# EAGLE board SIHMTEST (EAGLE 8.0.0)
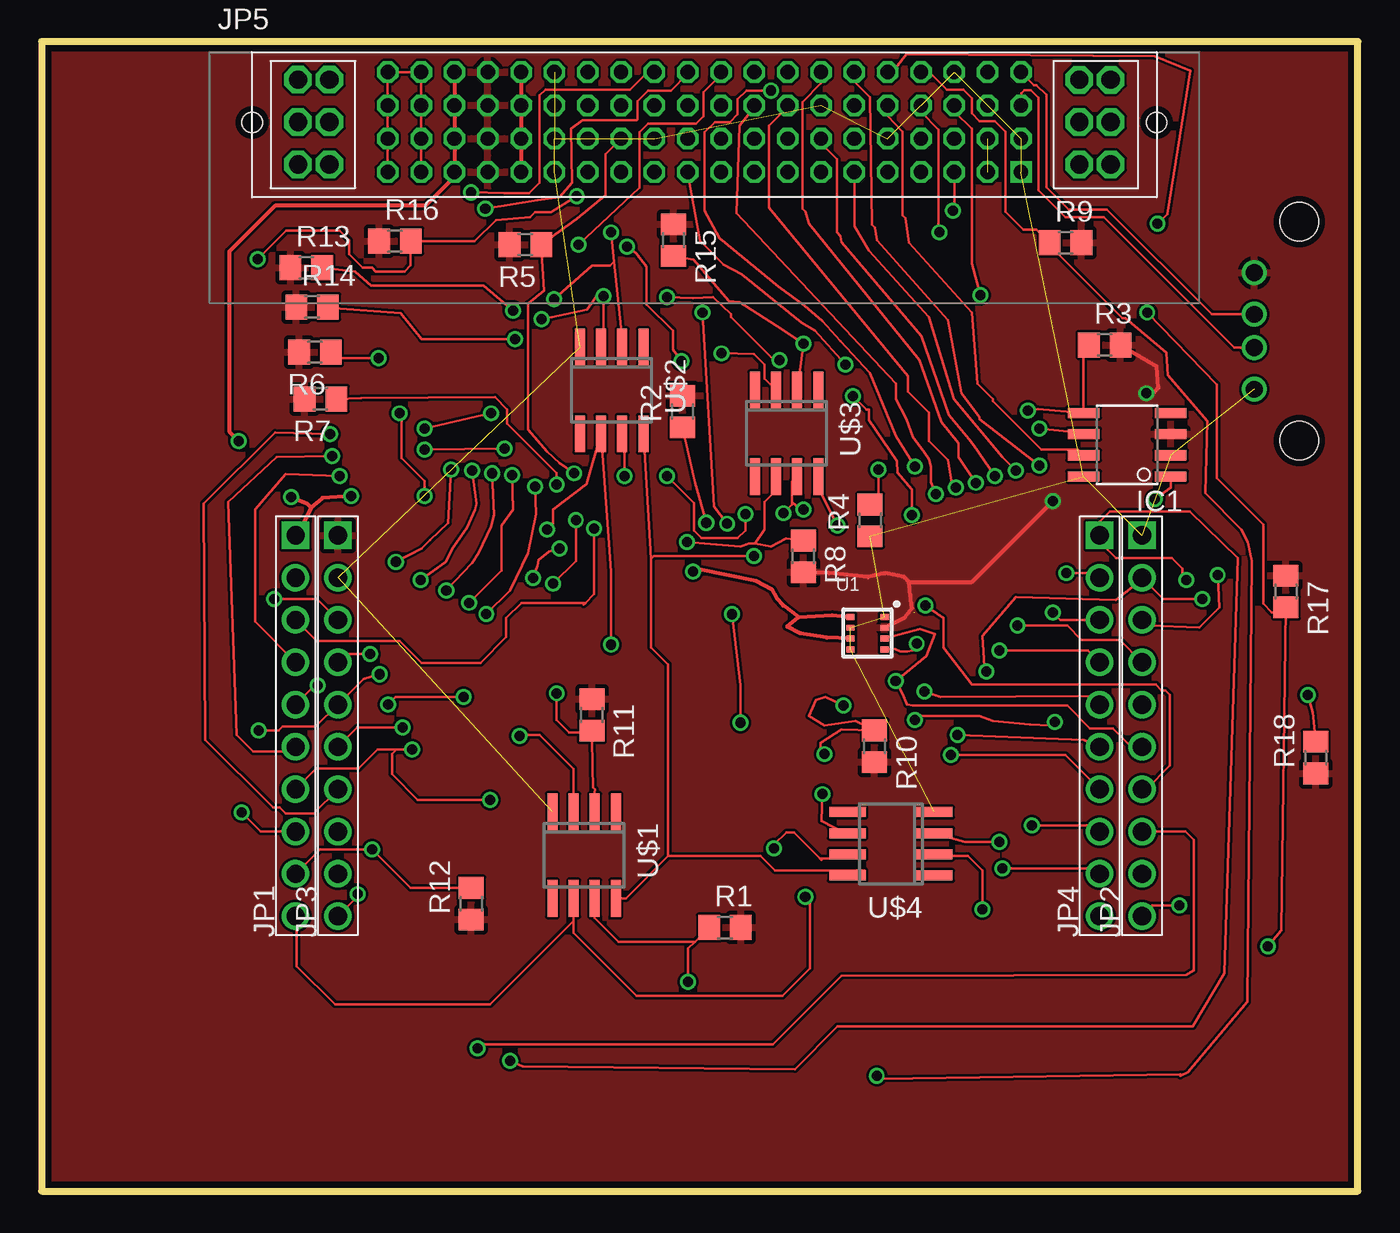
[diagram p0: board, top side]
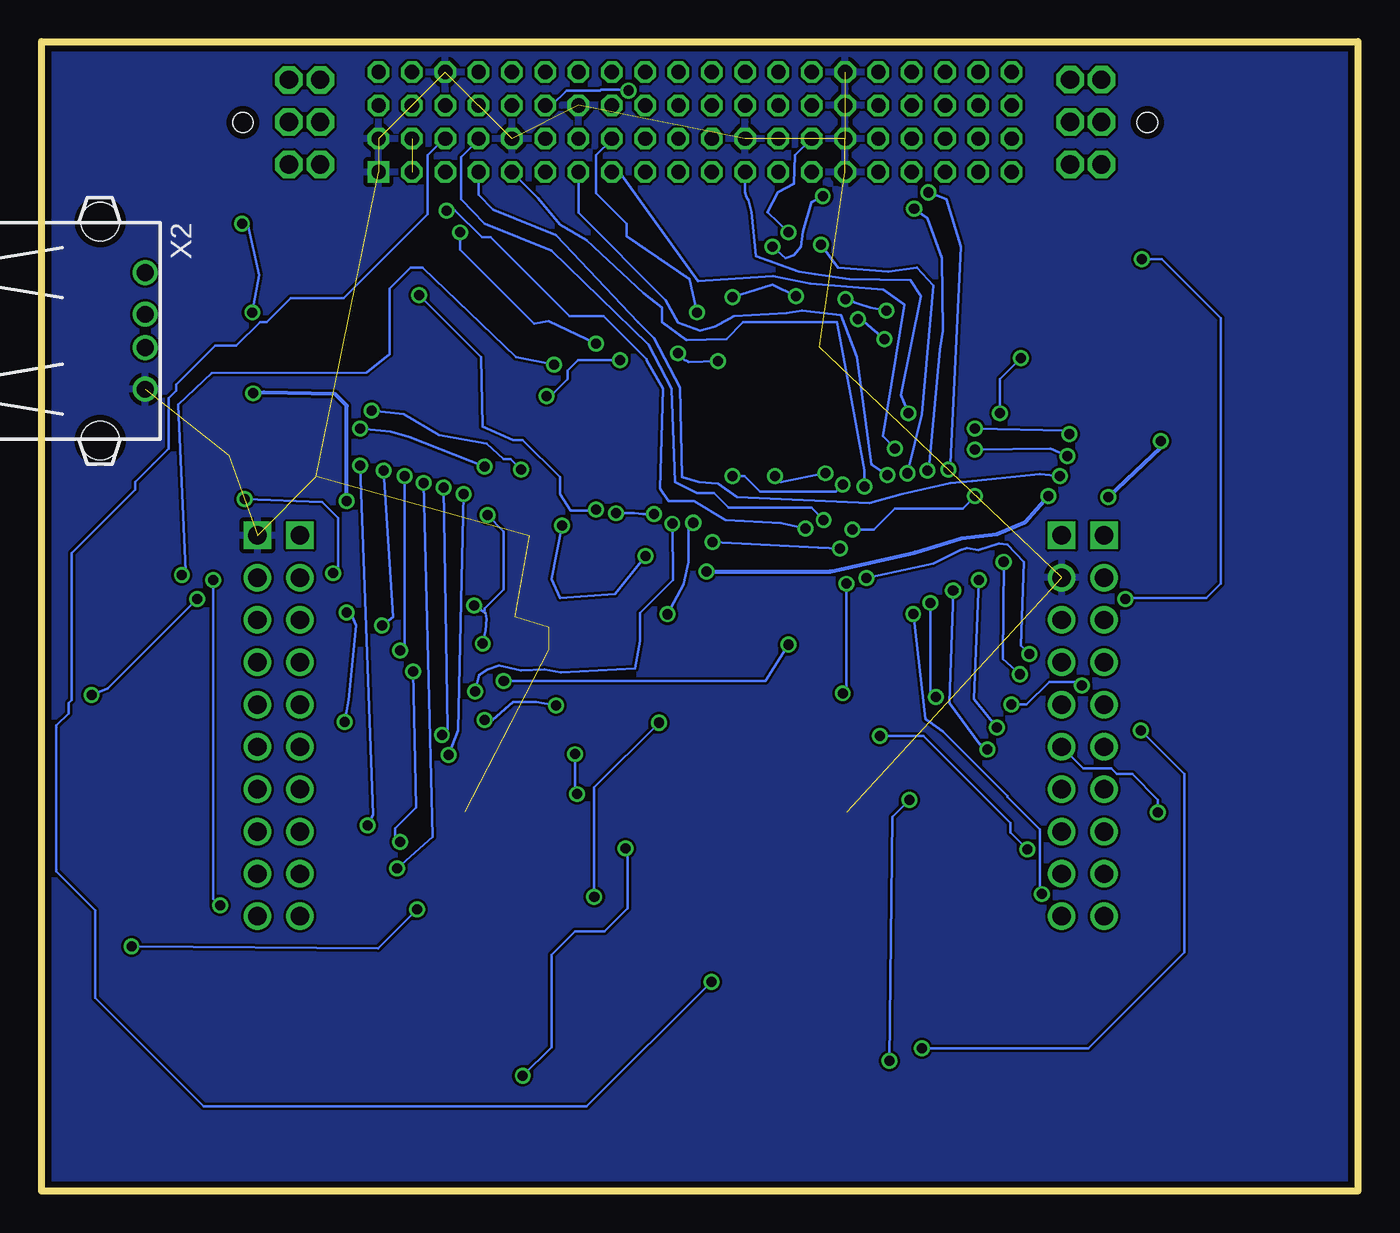
[diagram p1: board, bottom side, seen from below]

Size 79 x 69 mm. Coordinates in mm from the lower left corner, seen from the top.
Outline: 0,0 79,0 79,69 0,69 0,0
Copper layers (1*16): Top 0.0356mm / dielectric 1.5011mm / Bottom 0.0356mm
Design rules "OshPark": minimum track width 6mil, minimum drill 13mil, track to track 6mil, track to pad 6mil, pad to pad 6mil, via to via 6mil, smd to smd 6mil, copper to edge 15mil, drill to drill 6mil, minimum pad ring 7mil, minimum via ring 7mil, stop-mask expansion 3mil, vias tented up to drill 0mil, thermal gap 10mil
Net classes: 1 usb: clearance 0.152 mm

## Footprints (pad centres in the part's own frame; a part is rotated, then mirrored left to right if it is on the bottom)
SO08 = smd 0.61 x 1.905: 1 -1.905,-2.616; 2 -0.635,-2.616; 3 0.635,-2.616; 4 1.905,-2.616; 5 1.905,2.616; 6 0.635,2.616; 7 -0.635,2.616; 8 -1.905,2.616
KK254_10-PIN = drill 1.1 square: P$1 11.43,0 | drill 1.1: P$2 8.89,0; P$3 6.35,0; P$4 3.81,0; P$5 1.27,0; P$6 -1.27,0; P$7 -3.81,0; P$8 -6.35,0; P$9 -8.89,0; P$10 -11.43,0
MPSC-01-80 = drill 0.86 square: 1 19,0.33 | drill 0.86 octagon: 2 17,0.33; 3 15,0.33; 4 13,0.33; 5 11,0.33; 6 9,0.33; 7 7,0.33; 8 5,0.33; 9 3,0.33; 10 1,0.33; 11 -1,0.33; 12 -3,0.33; 13 -5,0.33; 14 -7,0.33; 15 -9,0.33; 16 -11,0.33; 17 -13,0.33; 18 -15,0.33; 19 -17,0.33; 20 -19,0.33; 21 19,2.33; 22 17,2.33; 23 15,2.33; 24 13,2.33; 25 11,2.33; 26 9,2.33; 27 7,2.33; 28 5,2.33; 29 3,2.33; 30 1,2.33; 31 -1,2.33; 32 -3,2.33; 33 -5,2.33; 34 -7,2.33; 35 -9,2.33; 36 -11,2.33; 37 -13,2.33; 38 -15,2.33; 39 -17,2.33; 40 -19,2.33; 41 19,4.33; 42 17,4.33; 43 15,4.33; 44 13,4.33; 45 11,4.33; 46 9,4.33; 47 7,4.33; 48 5,4.33; 49 3,4.33; 50 1,4.33; 51 -1,4.33; 52 -3,4.33; 53 -5,4.33; 54 -7,4.33; 55 -9,4.33; 56 -11,4.33; 57 -13,4.33; 58 -15,4.33; 59 -17,4.33; 60 -19,4.33; 61 19,6.33; 62 17,6.33; 63 15,6.33; 64 13,6.33; 65 11,6.33; 66 9,6.33; 67 7,6.33; 68 5,6.33; 69 3,6.33; 70 1,6.33; 71 -1,6.33; 72 -3,6.33; 73 -5,6.33; 74 -7,6.33; 75 -9,6.33; 76 -11,6.33; 77 -13,6.33; 78 -15,6.33; 79 -17,6.33; 80 -19,6.33 | drill 1.1 octagon: P1,1 -24.385,0.79; P1,2 -22.505,0.79; P1,3 -24.385,3.33; P1,4 -22.505,3.33; P1,5 -24.385,5.87; P1,6 -22.505,5.87; P2,1 24.385,0.789; P2,2 22.505,0.789; P2,3 24.385,3.329; P2,4 22.505,3.329; P2,5 24.385,5.869; P2,6 22.505,5.869 | hole 1.2: -27.145,3.3; 27.145,3.3
R0805 = smd 1.3 x 1.5: 1 -0.95,0; 2 0.95,0
BME280_LGA = smd 0.5 x 0.35: P$1 1.025,0.975; P$2 1.025,0.325; P$3 1.025,-0.325; P$4 1.025,-0.975; P$5 -1.025,-0.975; P$6 -1.025,-0.325; P$7 -1.025,0.325; P$8 -1.025,0.975
SO8 = smd 0.6 x 2.2: 1 -1.905,-2.6; 2 -0.635,-2.6; 3 0.635,-2.6; 4 1.905,-2.6; 5 1.905,2.6; 6 0.635,2.6; 7 -0.635,2.6; 8 -1.905,2.6
USB = drill 1: 1 -3.5,12.99; 2 -1,12.99; 3 1,12.99; 4 3.5,12.99 | hole 2.3: -6.57,10.28; 6.57,10.28

## Placement (x,y rotation side)
IC1  MCP2551/SN  [SO08]  65.15,44.81 90 top
JP1  KK254_10-PIN  [KK254_10-PIN]  15.24,27.94 90 top
JP2  KK254_10-PIN  [KK254_10-PIN]  66.04,27.94 90 top
JP3  KK254_10-PIN  [KK254_10-PIN]  17.78,27.94 90 top
JP4  KK254_10-PIN  [KK254_10-PIN]  63.5,27.94 90 top
JP5  [MPSC-01-80]  39.78,60.85 0 top
R1  5k  [R0805]  41.01,15.82 0 top
R2  5k  [R0805]  38.47,46.79 90 top
R3  10k  [R0805]  63.8,50.8 0 top
R4  10k  [R0805]  49.73,40.27 90 top
R5  5k  [R0805]  29.04,56.81 180 top
R6  5k  [R0805]  16.4,50.36 180 top
R7  5k  [R0805]  16.74,47.56 180 top
R8  5k  [R0805]  45.71,38.11 270 top
R9  5k  [R0805]  61.46,56.92 0 top
R10  5k  [R0805]  49.99,26.71 270 top
R11  5k  [R0805]  33.02,28.59 270 top
R12  5k  [R0805]  25.79,17.25 90 top
R13  5k  [R0805]  15.89,55.42 0 top
R14  5k  [R0805]  16.24,53.08 0 top
R15  5k  [R0805]  37.93,57.08 270 top
R16  5k  [R0805]  21.21,57.03 0 top
R17  5k  [R0805]  74.69,35.99 270 top
R18  5k  [R0805]  76.47,26.02 90 top
U1  BME280  [BME280_LGA]  49.57,33.5 0 top
U$1  P82B715  [SO8]  32.56,20.17 180 top
U$2  P82B715  [SO8]  34.21,48.06 180 top
U$3  P82B715  [SO8]  44.71,45.49 180 top
U$4  P82B715  [SO8]  50.97,20.85 90 top
X2  [USB]  85.78,51.63 270 bottom

## Library data of the parts
IC1 = microchip-dspic
JP1-JP4 = molex
JP5 = samtec
R1-R18 = resistor
U1 = BME280ComponentLibrary; PROD_ID: IC-13090
U$1-U$4 = NXP
X2 = con-amp

## Nets
3.3V: JP1.P$1 JP5.18 JP5.38 JP5.58 JP5.78 U1.P$6 U1.P$8
5V: IC1.3 JP3.P$1 JP5.17 JP5.37 JP5.57 JP5.77 R1.2 R2.2 R3.2 R5.2 R6.2 R7.2 R8.2 R9.2 R10.2 R11.1 R12.1 R13.1 R14.1 R15.1 R16.1 R17.1 R18.1 U1.P$2 X2.1
12V: JP5.16 JP5.36 JP5.56 JP5.76
ACT_SCL: JP5.24 R11.2 U$1.2
ACT_SDA: JP5.23 R1.1 U$1.7
ACT_UNBUFFERSCL: JP1.P$9 R12.2 U$1.3
ACT_UNBUFFERSDA: JP1.P$10 R2.1 U$1.6
AGND: JP5.19 JP5.20 JP5.39 JP5.40 JP5.59 JP5.60 JP5.79 JP5.80
BATT_SCL: JP5.44 R15.2 U$3.2
BATT_SDA: JP5.43 R7.1 U$3.7
BATT_UNBUFFERSCL: JP3.P$3 R16.2 U$3.3
BATT_UNBUFFERSDA: JP3.P$4 R8.1 U$3.6
BUFFERVCC: U$1.8 U$2.8 U$3.8 U$4.8
CANH: IC1.7 JP5.45
CANL: IC1.6 JP5.46
CANRX: IC1.4
CANTX: IC1.1 JP4.P$2
CE_2: JP5.52
CE_3: JP5.53
CE_4: JP5.54
CE_CPU: JP5.74
CE_LEDS: JP5.73
CTS_CF: JP5.13
CTS_MC: JP5.29
CTS_MD: JP5.68
CTS_MF: JP3.P$10 JP5.5
CTS_PF: JP5.9
CTS_SF: JP5.50
DGND: IC1.2 IC1.8 JP2.P$1 JP3.P$2 JP5.1 JP5.15 JP5.21 JP5.25 JP5.32 JP5.35 JP5.47 JP5.55 JP5.63 JP5.75 R4.1 U1.P$1 U1.P$5 U1.P$7 U$1.4 U$2.4 U$4.4 X2.4
EXT_SCL: JP5.34 R13.2 U$2.2
EXT_SDA: JP5.33 R5.1 U$2.7
EXT_UNBUFFERSCL: JP2.P$7 R14.2 U1.P$4 U$2.3
EXT_UNBUFFERSDA: JP2.P$6 R6.1 U1.P$3 U$2.6
GPIO: JP5.2 JP5.22
GPIO_42: JP5.42
GPIO_62: JP5.62
INT_SCL: JP5.65 R17.2 U$4.2
INT_SDA: JP5.64 R9.1 U$4.7
INT_UNBUFFERSCL: JP2.P$2 R18.2 U$4.3
INT_UNBUFFERSDA: JP4.P$3 R10.1 U$4.6
MISO: JP2.P$8 JP3.P$5 JP5.72
MOSI: JP1.P$8 JP3.P$6 JP5.71
N$2: IC1.5 R3.1 R4.2
PA3: JP2.P$9
PB5: JP1.P$2
PE2: JP3.P$8
PE3: JP3.P$9
PF4: JP4.P$10
PWM_0: JP5.31
PWM_1: JP5.26
RES: JP2.P$5
RTS_CF: JP5.14
RTS_MC: JP5.30
RTS_MD: JP5.69
RTS_MF: JP2.P$4 JP5.6
RTS_PF: JP5.10
RTS_SF: JP5.51
RX_CF: JP2.P$3 JP5.11
RX_MC: JP4.P$4 JP5.27
RX_MD: JP4.P$8 JP5.66
RX_MF: JP1.P$3 JP5.3
RX_PF: JP1.P$5 JP5.7
RX_SF: JP4.P$6 JP5.48
SPI_CLK: JP1.P$7 JP2.P$10 JP4.P$1 JP5.70
TX_CF: JP3.P$7 JP5.12
TX_MC: JP4.P$5 JP5.28
TX_MD: JP4.P$9 JP5.67
TX_MF: JP1.P$4 JP5.4
TX_PF: JP1.P$6 JP5.8
TX_SF: JP4.P$7 JP5.49
USB_N [usb]: JP5.61 X2.2
USB_P [usb]: JP5.41 X2.3

## Tracks (layer width: path | path; a pad name or v marks a point on that pad's centre or on a via)
3.3V  (via drill 0.6, 0.61)
  Top 0.254: U1.P$6 47.12,33.23 45.55,33.49 44.75,33.89 45.43,34.46 | 45.43,34.46 47.46,34.58 U1.P$8 | v39.09,37.2 39.49,37.32 42.86,36.63 43.83,36.12 44.14,35.57 44.52,35.15 45.43,34.46 | v18.57,41.72 16.86,41.6 16.17,41.03 | 16.17,41.03 15.49,39.62 JP1.P$1 | JP5.78 JP5.58 JP5.38 JP5.18 24.78,60.9 23.03,59.15 14,59.15 11.26,56.41 11.26,45.61 v11.83,45.03 | v14.97,41.66 15.95,41.26 16.17,41.03
  Bottom 0.254: v39.09,37.2 31.66,37.2 26.57,38.35 23.77,39.2 21.66,39.43 19.95,40.18 v18.57,41.72 | v11.83,45.03 11.83,44.63 v14.97,41.66
5V  (via drill 0.6)
  Top 0.254: U1.P$2 51.82,34.45 52.23,34.98 52.06,36.58 | 52.06,36.58 51.78,36.86 50.63,37.09 49.61,36.86 47.28,37.09 R8.2 | 52.06,36.58 55.84,36.58 v60.69,41.43 | v66.29,47.89 66.81,48.01 67.04,48.23 66.92,49.49 R3.2
  Bottom 0.254: v60.69,41.43 60.69,47.15 61.38,47.84 65.67,47.95 v66.29,47.89
  pour Top: 0,68.94 79,69 79,0 0,0
12V
  Top 0.254: JP5.76 JP5.56 JP5.36 JP5.16
ACT_SCL  (via drill 0.6)
  Top 0.152: U$1.2 33.03,22.94 33.2,24.12 33.09,24.23 33.09,24.63 33.08,25.04 R11.2 32.93,27.55 31.66,27.55 30.92,28.29 v30.92,29.89 | v32.06,40.29 32.06,37.83 v30.69,36.46
  Bottom 0.152: JP5.24 52.78,63.12 53.84,62.06 53.84,59.55 52.41,58.06 48.41,56.46 42.58,50.81 41.2,48.18 40.98,42.58 39.66,41.89 38.63,41.89 37.78,41.03 32.8,41.03 v32.06,40.29 | v30.69,36.46 30.69,30.12 v30.92,29.89
ACT_SDA  (via drill 0.6)
  Top 0.152: U$1.7 33.2,16.41 34.63,14.97 39.21,14.97 | 39.21,14.97 R1.1 | v38.8,12.57 38.8,14.56 39.21,14.97
  Bottom 0.152: JP5.23 54.84,63.18 55.84,62.18 55.84,58.64 60.87,53.61 64.06,53.61 65.49,52.18 65.89,52.18 67.32,50.75 68.58,50.75 70.92,48.41 70.92,48.06 71.38,47.61 71.38,44.58 73.38,42.58 73.38,42.12 77.21,38.29 77.21,29.49 77.38,29.32 77.38,28.69 78.12,27.95 78.12,19.2 75.78,16.86 75.78,11.6 69.27,5.09 46.29,5.09 v38.8,12.57
ACT_UNBUFFERSCL  (via drill 0.61)
  Top 0.152: U$1.3 31.93,25.34 29.89,27.38 28.75,27.38 v28.69,27.32 | JP1.P$9 16.71,20.52 v19.83,20.52 22.14,18.2 R12.2
  Bottom 0.152: v28.69,27.32 26.06,27.32 20.86,22.12 20.86,21.55 v19.83,20.52
ACT_UNBUFFERSDA  (via drill 0.61)
  Top 0.152: v45.83,17.66 46.12,17.37 46.12,13.37 44.46,11.72 35.72,11.72 31.93,15.51 U$1.6 31.93,16.21 26.92,11.2 17.6,11.2 15.32,13.49 15.32,16.43 JP1.P$10 | v41.95,28.12 41.95,30.35 v41.43,34.63 | v39.89,40.12 39.2,42.53 R2.1
  Bottom 0.152: v45.83,17.66 45.83,24.23 v41.95,28.12 | v41.43,34.63 40.46,36.41 40.18,37.78 40.18,39.83 v39.89,40.12
AGND
  Top 0.152: JP5.19 JP5.39 JP5.59 JP5.79 JP5.80 JP5.60 JP5.40 JP5.20
BATT_SCL  (via drill 0.6)
  Top 0.152: JP5.44 52.78,64.78 53.84,63.72 53.84,57.61 v53.89,57.55 | U$3.2 45.38,48.12 v45.72,50.86 44.86,51.44 44.46,51.72 41.89,53.38 41.26,53.44 39.14,55.9 R15.2
  Bottom 0.152: v53.89,57.55 53.89,56.52 49.44,52.06 48.58,52.23 v45.72,50.86
BATT_SDA  (via drill 0.6)
  Top 0.152: JP5.43 54.78,64.78 55.84,63.78 55.84,55.66 v56.35,53.78 | v45.72,40.92 45.26,41.15 45.03,41.38 | 45.03,41.38 45.03,42.58 U$3.7 | 45.03,41.38 45.03,41.2 v44.52,40.69 | v42.23,40.63 42.23,39.66 41.78,39.2 39.6,39.2 39.15,39.66 39.15,41.32 v37.55,42.92 | v30.92,42.41 30.92,43.09 27.95,46.06 27.95,46.92 27.2,47.66 19.17,47.61 R7.1
  Bottom 0.152: v56.35,53.78 52.63,50.06 52.52,45.89 50.69,45.09 50.12,45.09 47.89,42.86 47.89,41.83 47.26,40.86 46.01,40.86 v45.72,40.92 | v44.52,40.69 43.43,40.69 42.92,40.63 v42.23,40.63 | v37.55,42.92 36.8,42.92 35.89,42.01 31.32,42.01 v30.92,42.41
BATT_UNBUFFERSCL  (via drill 0.6)
  Top 0.152: v32.12,59.72 30.57,58.75 29.6,58.75 29.32,58.46 27.26,58.29 26,57.03 R16.2 22.16,55.59 21.77,55.21 20.06,55.21 19.83,55.44 19.26,55.44 18.46,56.24 18.46,57.09 17.89,57.66 14.69,57.66 v12.97,55.95 | v35.15,56.69 35.66,56.29 36.29,55.49 36.29,53.21 37.89,51.66 37.89,50.52 v38.41,49.84 | v40.8,50.29 42.75,50.23 43.38,49.61 43.38,48.79 U$3.3 | v13.95,35.55 16.52,35.55 JP3.P$3
  Bottom 0.152: v32.12,59.72 32.8,59.38 33.32,57.61 33.43,56.69 33.83,56.18 34.35,56.01 v35.15,56.69 | v38.41,49.84 40.18,49.78 40.23,49.84 40.41,49.89 v40.8,50.29 | v12.97,55.95 11.77,55.95 8.23,52.41 8.23,36.46 9.09,35.6 13.89,35.6 v13.95,35.55
BATT_UNBUFFERSDA  (via drill 0.6)
  Top 0.152: R8.1 44.67,39.17 43.78,38.69 42.82,38.87 | U$3.6 44.06,42.88 44.06,42.06 43.38,41.38 43.38,39.71 42.82,38.87 | 42.82,38.87 42.46,38.86 41.95,38.69 40.52,38.8 v38.75,38.98 | v31.09,38.58 30.46,38.41 29.83,37.89 29.77,37.55 v29.49,36.8 | v19.72,32.23 18.26,32.23 JP3.P$4
  Bottom 0.152: v38.75,38.98 32.4,38.63 v31.09,38.58 | v29.49,36.8 25.49,37.66 23.86,38.49 23.46,38.6 22.77,38.49 21.55,38.86 21.03,38.8 20.06,37.78 20.23,32.75 v19.72,32.23
BUFFERVCC  (via drill 0.6)
  Top 0.152: U$1.8 35.06,17.57 37.6,20.12 | 37.6,20.12 37.6,31.6 36.58,32.63 36.58,37.34 36.58,37.95 | 36.58,37.95 U$2.8 | 37.6,20.12 43.15,20.12 44.01,19.26 49.38,19.26 U$4.8 | U$3.8 46.62,42.2 v47.78,39.95 | v42.75,38.12 36.75,38.12 36.58,37.95
  Bottom 0.152: v47.78,39.95 48.41,36.75 47.89,35.6 44.58,35.83 v42.75,38.12
CANH
  Top 0.152: JP5.45 50.78,64.55 51.66,63.61 51.66,58.58 51.84,58.41 52.06,56.92 55.84,52.75 56.18,48.46 57.09,47.55 57.09,47.43 60.01,44.52 62.19,44.52 IC1.7
CANL  (via drill 0.6, 0.61)
  Top 0.152: v43.78,66.06 42.29,66.06 41.78,65.55 41.78,64.64 41.32,64.18 40.41,64.18 39.78,63.55 39.78,58.86 | 39.78,58.86 39.83,58.81 | 39.78,58.86 40.69,57.21 44.23,54.29 45.78,53.15 46.86,52.23 47.95,51.03 49.72,49.09 51.26,45.32 v52.41,43.49 | v59.89,45.78 62.48,45.49 IC1.6
  Bottom 0.152: JP5.46 48.38,65.18 47.49,66.06 45.49,66.06 45.43,66.12 43.83,66.12 v43.78,66.06 | v52.41,43.49 56.92,45.26 58.06,45.61 v59.89,45.78
CANTX  (via drill 0.6)
  Top 0.152: IC1.1 67.77,42.22 v66.81,41.55 | v61.49,37.09 63.24,37.09 JP4.P$2
  Bottom 0.152: v66.81,41.55 62.18,41.38 61.21,40.41 61.21,37.38 v61.49,37.09
CTS_MF  (via drill 0.6)
  Top 0.152: v29.6,42.29 29.66,40.63 29.2,38.29 28.12,36.06 v26.69,34.63 | v18.97,17.83 18.97,17.7 JP3.P$10
  Bottom 0.152: JP5.5 49.21,59.61 47.89,58.01 46.29,57.09 42.86,53.89 41.78,53.03 41.78,52.18 40.29,51.09 37.89,51.15 36.92,52.18 31.26,52.18 30.52,48.18 29.6,43.26 v29.6,42.29 | v26.69,34.63 25.95,28.35 24.92,27.6 21.03,23.72 21.03,23.66 19.09,21.72 19.09,17.95 v18.97,17.83
DGND  (21 unrouted)
  pour Bottom: 0,69 79,69 79,0 0,0
EXT_SCL  (via drill 0.6)
  Top 0.152: 34.36,55.79 v34.18,57.55 | 34.36,55.79 34.86,50.99 U$2.2 | R13.2 18.82,55.19 19.77,54.35 26.52,54.35 v28.29,52.86 | v30.75,53.55 33.03,55.55 34.12,55.55 34.36,55.79
  Bottom 0.152: JP5.34 33.78,62.18 33.83,60.47 34.8,59.95 35.43,58.75 v34.18,57.55 | v28.29,52.86 29.26,53.03 30,53.26 v30.75,53.55
EXT_SDA  (via drill 0.6)
  Top 0.152: v34.98,42.92 34.98,45.33 U$2.7 | JP5.33 33.83,62.23 33.83,59.78 32.13,58.37 R5.1 30.16,54.05 29.2,53.26 29.2,45.72 30.35,44.41 31.09,43.72 v31.95,43.09
  Bottom 0.152: v31.95,43.09 34.63,42.58 v34.98,42.92
EXT_UNBUFFERSCL  (via drill 0.6)  (1 unrouted)
  Top 0.152: JP2.P$7 66.31,24.13 67.72,25.55 67.72,29.77 67.44,30.06 67.21,30.06 66.86,30.4 55.84,30.4 54.12,32.63 54.12,34.4 v53.03,35.15 | v52.52,32.86 52.29,32.52 52.29,32.46 51.95,32.4 51.55,32.4 51.21,32.54 U1.P$4 | v52.23,40.58 52.23,42.12 51.38,43.15 51.32,43.83 49.66,46.29 49.66,46.92 49.49,46.92 v48.69,47.72 | v44.29,49.89 43.95,49.89 41.38,52.46 41.38,52.63 40.29,53.66 39.09,53.61 v37.55,53.66 | U$2.3 33.72,50.81 v33.72,53.72 33.32,53.72 32.75,52.92 30.63,52.46 v30,52.35 | v28.4,51.15 22.8,51.15 21.55,52.69 17.12,53.03 R14.2
  Bottom 0.152: v53.03,35.15 52.35,34.69 52.29,34.35 52.35,33.66 v52.52,32.86 | 52.4,34.73 52.4,34.98 51.26,36.12 51.26,39.6 v52.23,40.58 | v48.69,47.72 48.46,47.72 47.43,48.75 47.43,49.26 46.81,49.89 v44.29,49.89 | v37.55,53.66 35.15,54.41 v33.72,53.72 | v30,52.35 29.6,52.18 v28.4,51.15
EXT_UNBUFFERSDA  (via drill 0.6, 0.61)
  Top 0.152: U1.P$3 52.73,33.74 53.61,33.43 53.09,32.12 v51.26,30.63 51.66,29.89 51.95,29.2 52.29,29.15 61.55,29.15 62.92,27.77 64.29,27.77 65.4,26.67 JP2.P$6 | v34.18,32.8 34.18,37.2 U$2.6 32.72,42.43 30.69,40.92 30.69,40.06 v30.35,39.72 | v22.97,41.72 22.97,42.63 21.6,44.01 21.6,46.58 v21.49,46.69 | v20.23,50.01 17.3,50.01 R6.1
  Bottom 0.152: v51.26,30.63 35.55,30.63 v34.18,32.8 | v30.35,39.72 29.03,39.72 27.77,40.98 23.72,40.98 v22.97,41.72 | v21.49,46.69 21.49,48.75 v20.23,50.01
GPIO  (1 unrouted)
INT_SCL  (via drill 0.6)
  Top 0.152: JP5.65 51.06,67.18 51.89,68.24 66.81,68.12 68.93,67.27 67.56,58.64 v66.98,58.06 | v66.35,52.75 70.53,48.41 70.53,42.8 73.32,40.01 73.32,35.26 73.84,34.75 74.39,34.75 R17.2 74.4,15.65 v73.61,14.69 | v56.46,16.92 56.46,19.26 55.61,20.12 53.67,20.12 U$4.2
  Bottom 0.152: v66.98,58.06 66.64,58.06 65.95,54.98 v66.35,52.75 | v73.61,14.69 58.81,14.57 v56.46,16.92
INT_SDA  (via drill 0.6)
  Top 0.152: JP5.64 53.3,67.18 54.35,66.12 55.32,66.12 55.84,65.61 55.84,64.69 56.29,64.24 57.21,64.24 57.84,63.61 57.84,58.81 58.92,57.72 59.7,57.72 R9.1 60.51,56.77 64.86,52.41 65.04,52.41 67.49,50.35 67.61,48.98 69.95,46.23 69.84,41.89 72.01,39.72 72.41,38.98 72.64,37.83 72.35,11.37 68.81,7.14 68.35,6.92 68.35,7.03 50.29,6.74 v50.12,6.92 | v43.95,20.57 43.95,20.8 44.69,21.55 45.15,21.55 46.72,19.97 | 46.72,19.97 46.81,19.89 | 46.72,19.97 48.13,19.97 U$4.7
  Bottom 0.152: v50.12,6.92 48.41,8.63 48.41,14.17 46.98,15.6 45.21,15.6 43.83,16.97 43.83,20.46 v43.95,20.57
INT_UNBUFFERSCL  (via drill 0.6)
  Top 0.152: v56.69,31.2 56.58,31.49 56.46,33.32 58.46,35.66 64.47,35.49 66.04,36.72 JP2.P$2 67.32,35.55 v69.67,35.55 | v57.49,20.97 55.4,20.97 U$4.3 | R18.2 76.3,28.74 v76.01,29.77
  Bottom 0.152: v56.69,31.2 56.52,23.03 57.78,21.77 57.78,21.26 v57.49,20.97 | v76.01,29.77 75.04,30.18 v69.67,35.55
INT_UNBUFFERSDA  (via drill 0.6)
  Top 0.152: JP4.P$3 61.15,34.29 v60.69,34.75 | v60.81,28.18 60.52,27.95 59.32,28 57.09,28.23 56.29,28.52 52.63,28.52 v52.41,28.29 | v48.12,29.15 47.03,29.66 46.46,29.49 46.06,28.52 46.98,27.95 48.85,28.23 R10.1 48,27.71 46.75,26.92 46.75,26.46 v46.98,26.23 | v46.86,23.83 46.81,22.23 48.31,21.43 U$4.6
  Bottom 0.152: v60.69,34.75 60.47,34.75 60.12,33.95 60.58,29.49 v60.81,28.18 | v52.41,28.29 51.95,28.29 50.69,29.38 49.32,29.38 v48.12,29.15 | v46.98,26.23 46.98,23.95 v46.86,23.83
MISO  (via drill 0.6, 0.61)
  Top 0.152: JP5.72 36.37,67.18 35.32,66.12 30.23,66.12 29.89,65.78 29.89,60.52 29.26,59.89 27.77,59.89 v25.77,59.95 | v24.57,43.32 24.4,40.12 23.32,39.09 22.8,38.58 v21.26,37.78 | v20.29,31.03 19.32,30.75 JP3.P$5 16.46,27.89 14.46,27.89 14.23,27.66 v13.03,27.66 | JP2.P$8 68.65,21.59 69.15,21.09 69.15,13.26 68.69,12.97 48.01,12.92 43.89,8.8 26.4,8.8 v26.18,8.57
  Bottom 0.152: v25.77,59.95 24.69,59.55 23.83,56.69 24.46,43.66 v24.57,43.32 | v21.26,37.78 21.32,31.95 v20.29,31.03 | v26.18,8.57 16.17,8.57 10.4,14.35 10.4,25.03 v13.03,27.66
MOSI  (via drill 0.6, 0.61)
  Top 0.152: JP5.71 38.78,67.07 37.78,66.06 36.41,66.06 35.78,65.44 35.78,64.35 35.72,64.29 32.46,64.29 31.77,63.78 31.83,60.52 31.09,59.66 29.77,59.49 v26.63,58.98 | v25.83,43.26 26.12,41.26 26,40.92 25.55,39.83 24.69,38.63 24.23,37.78 v22.75,36.69 | v21.66,27.83 18.94,27.83 JP3.P$6 | JP1.P$8 13.16,21.59 v12,22.75
  Bottom 0.152: v26.63,58.98 25.83,58.41 24.98,56.01 24.92,51.66 25.09,50.52 25.72,43.72 v25.83,43.26 | v22.75,36.69 23.03,29.55 v21.66,27.83 21.6,27.77 | v12,22.75 12,23.49 13.54,25.03 14.46,25.03 14.8,25.38 16.48,25.38 JP3.P$6
N$2  (via drill 0.6)
  Top 0.152: R3.1 62.53,49.97 IC1.5 59.8,46.94 v59.21,46.86 | v50.23,43.32 50.23,41.72 R4.2
  Bottom 0.152: v59.21,46.86 57.26,46.63 55.15,45.38 52.29,44.86 51.26,43.95 50.86,43.95 v50.23,43.32
RTS_MF  (via drill 0.6)
  Top 0.152: JP5.6 48.78,57.92 49.66,56.46 53.26,52.46 54.75,47.55 57.66,44.06 v58.46,43.26 | v58.58,33.95 61.55,33.95 62.41,33.09 64.7,33.09 JP2.P$4
  Bottom 0.152: v58.46,43.26 57.89,34.46 v58.58,33.95
RX_CF  (via drill 0.6)
  Top 0.152: JP5.11 39.52,57.06 40.92,55.61 42.01,55.03 45.61,52.12 46.41,51.66 v48.23,49.61 | v70.58,36.98 70.69,35.03 69.49,33.83 66.38,33.95 JP2.P$3
  Bottom 0.152: v48.23,49.61 50.52,50.06 56.12,55.44 56.86,55.44 58.12,54.18 58.12,50.23 59.49,49.15 68.81,49.09 70.81,47.21 70.35,37.2 v70.58,36.98
RX_MC  (via drill 0.6)
  Top 0.152: JP5.27 46.78,62.89 47.72,61.95 47.72,57.55 47.95,57.32 48.01,56.98 52.81,51.32 54.46,46.58 55.66,45.15 55.95,44.75 v57.21,42.92 | v57.49,32.46 62.79,32.46 JP4.P$4
  Bottom 0.152: v57.21,42.92 57.21,32.75 v57.49,32.46
RX_MD  (via drill 0.6)
  Top 0.152: JP5.66 48.78,66.61 49.72,65.67 49.84,58.01 50.01,57.84 50.12,57.09 54.41,52.29 55.21,47.89 56.29,46.46 56.29,46.35 v59.89,43.55 | v59.44,21.95 63.14,21.95 JP4.P$8
  Bottom 0.152: v59.89,43.55 59.09,22.57 v59.44,21.95
RX_MF  (via drill 0.6)
  Top 0.152: JP5.3 54.78,58.95 v54.69,58.86 | v33.15,39.78 33.15,35.83 32.63,35.32 | 32.63,35.32 32.52,35.2 | 32.63,35.32 28.8,35.32 27.89,34.4 27.89,33.26 26.35,31.72 22.8,31.72 21.49,33.03 16.5,33.03 JP1.P$3
  Bottom 0.152: v54.69,58.86 54.18,58.86 52.58,57.26 52.06,57.26 47.32,52.52 45.26,52.52 42.69,49.95 42.69,49.89 41.72,48.18 41.89,42.18 41.38,41.43 39.83,41.43 37.95,40.29 34.63,40.12 v33.15,39.78
RX_PF  (via drill 0.6)
  Top 0.152: v28.23,42.98 28.29,40.92 27.6,39.95 27.6,37.26 v25.66,35.32 | v25.32,29.66 21.26,29.66 v20.8,29.2 | v16.57,30.35 16.38,30.35 JP1.P$5
  Bottom 0.152: JP5.7 46.78,58.72 41.55,53.49 40.8,52.12 39.49,51.66 38.58,51.89 37.43,52.52 34.29,52.69 33.38,52.86 31.03,52.58 30.06,50.06 29.2,43.6 v28.23,42.98 | v25.66,35.32 25.66,30 v25.32,29.66 | v20.8,29.2 19.89,29.2 18.52,30.57 16.8,30.57 v16.57,30.35
RX_SF  (via drill 0.6)
  Top 0.152: JP5.48 44.78,65.06 43.66,63.95 43.66,59.04 52.01,48.92 52.01,48.01 53.26,46.75 53.26,45.03 54.41,43.89 54.63,42.46 v54.86,42.23 | v54.98,27.38 62.57,27.09 JP4.P$6
  Bottom 0.152: v54.86,42.23 54.63,27.72 v54.98,27.38
SPI_CLK  (via drill 0.6, 0.61)
  Top 0.152: JP5.70 40.78,67.01 39.72,65.95 39.72,64.52 39.26,64.06 36.41,64.06 35.89,63.55 35.89,60.24 v32.23,56.81 | v27.03,43.09 27.15,40.58 26.98,39.89 26.23,38.29 25.83,37.72 v24.29,36.06 | 21.32,26.52 v22.23,26.52 | 21.32,26.52 20.17,26.52 19.03,25.38 16.48,25.38 JP1.P$7 | v68.69,36.69 68.47,36.92 68.47,37.38 67.84,38.01 64.47,38.01 63.5,38.97 JP4.P$1 63.5,40.18 64.12,40.8 68.92,40.8 71.78,38.01 70.98,13.09 69.09,9.89 47.78,9.89 45.21,7.32 28.86,7.49 v28.12,7.83 | v68.29,17.14 66.67,17.14 JP2.P$10 | v26.92,23.49 22.57,23.49 21.03,25.03 21.03,26.23 21.32,26.52
  Bottom 0.152: v32.23,56.81 31.2,55.44 28.18,55.21 26.46,55.44 25.49,54.35 26.18,46.63 v27.03,43.09 | v24.29,36.06 24.52,29.32 22.69,26.8 22.52,26.8 v22.23,26.52 | v68.69,36.69 68.69,17.55 v68.29,17.14 | v28.12,7.83 27.95,22.46 v26.92,23.49
TX_CF  (via drill 0.6)
  Top 0.152: v26.98,46.69 v22.97,45.78 | v17.32,45.43 14,45.55 9.72,41.26 9.83,27.09 13.89,23.03 14.29,23.03 14.63,22.69 16.34,22.69 JP3.P$7
  Bottom 0.152: JP5.12 36.78,59.98 36.69,59.66 36.58,59.49 36.41,58.75 36.12,56.12 33.55,55.21 32.58,55.03 30.52,54.75 26.86,54.69 26.23,53.72 27.43,47.78 v26.98,46.69 | v22.97,45.78 17.55,45.66 v17.32,45.43
TX_MC  (via drill 0.6)
  Top 0.152: v39.66,52.75 40.35,41.09 v41.15,40.06 | v52.98,30 53.95,29.66 62.99,29.72 JP4.P$5
  Bottom 0.152: JP5.28 44.78,63.12 45.72,62.18 45.72,59.89 43.89,58.06 43.89,57.32 40.12,54.75 v39.66,52.75 | v41.15,40.06 41.09,36.69 43.09,34.69 43.09,33.03 43.38,31.38 47.84,31.15 48.81,31.32 50.23,31.26 51.55,31.55 52.23,31.32 52.75,30.98 v52.98,30
TX_MD  (via drill 0.6)
  Top 0.152: JP5.67 46.78,66.49 45.66,65.38 45.66,58.98 45.83,58.81 46.06,58.06 52.69,49.89 54.01,46.18 55.03,44.92 55.03,44.06 v56.06,42.52 | v57.66,19.37 63.18,19.37 JP4.P$9
  Bottom 0.152: v56.06,42.52 55.55,21.26 v57.66,19.37
TX_MF  (via drill 0.6)
  Top 0.152: v17.89,42.92 14.63,43.03 12.8,40.92 12.8,34.19 JP1.P$4
  Bottom 0.152: JP5.4 52.78,59.81 51.89,58.92 48.12,57.38 43.2,52.18 42.23,51.21 40.69,48.23 40.58,42.86 39.55,42.58 38.41,42.46 37.26,41.66 29.32,41.32 27.38,41.83 24.46,42.52 23.15,42.63 19.09,43.03 v17.89,42.92
TX_PF  (via drill 0.6)
  Top 0.152: JP1.P$6 14.97,26.4 12.69,26.4 11.72,27.38 11.2,41.38 14.12,44.06 v17.43,44.12 | v27.77,44.58 v22.97,44.52
  Bottom 0.152: JP5.8 44.32,61.18 39.6,54.63 35.09,54.92 32.86,54.46 28.46,54.12 27.2,53.21 28.52,45.32 v27.77,44.58 | v22.97,44.52 18.46,44.58 v17.43,44.12
TX_SF  (via drill 0.6)
  Top 0.152: JP5.49 42.78,65.06 41.89,63.95 41.72,58.69 51.26,48.46 51.26,47.55 51.89,46.35 52.29,45.26 52.98,44.35 53.26,43.95 53.38,43.49 53.38,42.58 v53.66,41.83 | v54.58,26.18 61.45,26.18 JP4.P$7
  Bottom 0.152: v53.66,41.83 54.01,27.66 v54.58,26.18
USB_N
  Top 0.152: X2.2 70.22,52.63 63.93,58.92 61.65,58.92 60.29,60.27 60.29,65.82 59.71,66.4 59.55,66.4 JP5.61
USB_P
  Top 0.152: X2.3 71.57,50.63 63.74,58.46 61.46,58.46 59.84,60.08 59.84,65.63 59.39,66.08 58.99,66.08 58.81,65.89 58.81,65.21
  Top 0.254: 58.81,65.21 JP5.41